# Altium PCB CONNECTORS1.PcbDoc
Units mil, origin at the board's own origin, x right, y up, seen from the top; angles counter-clockwise.
Board outline 1920.11 x 910.11 mil, 2 copper layers (Top Layer, Bottom Layer); 14 components, 6 nets, 47 pads, 1 vias.
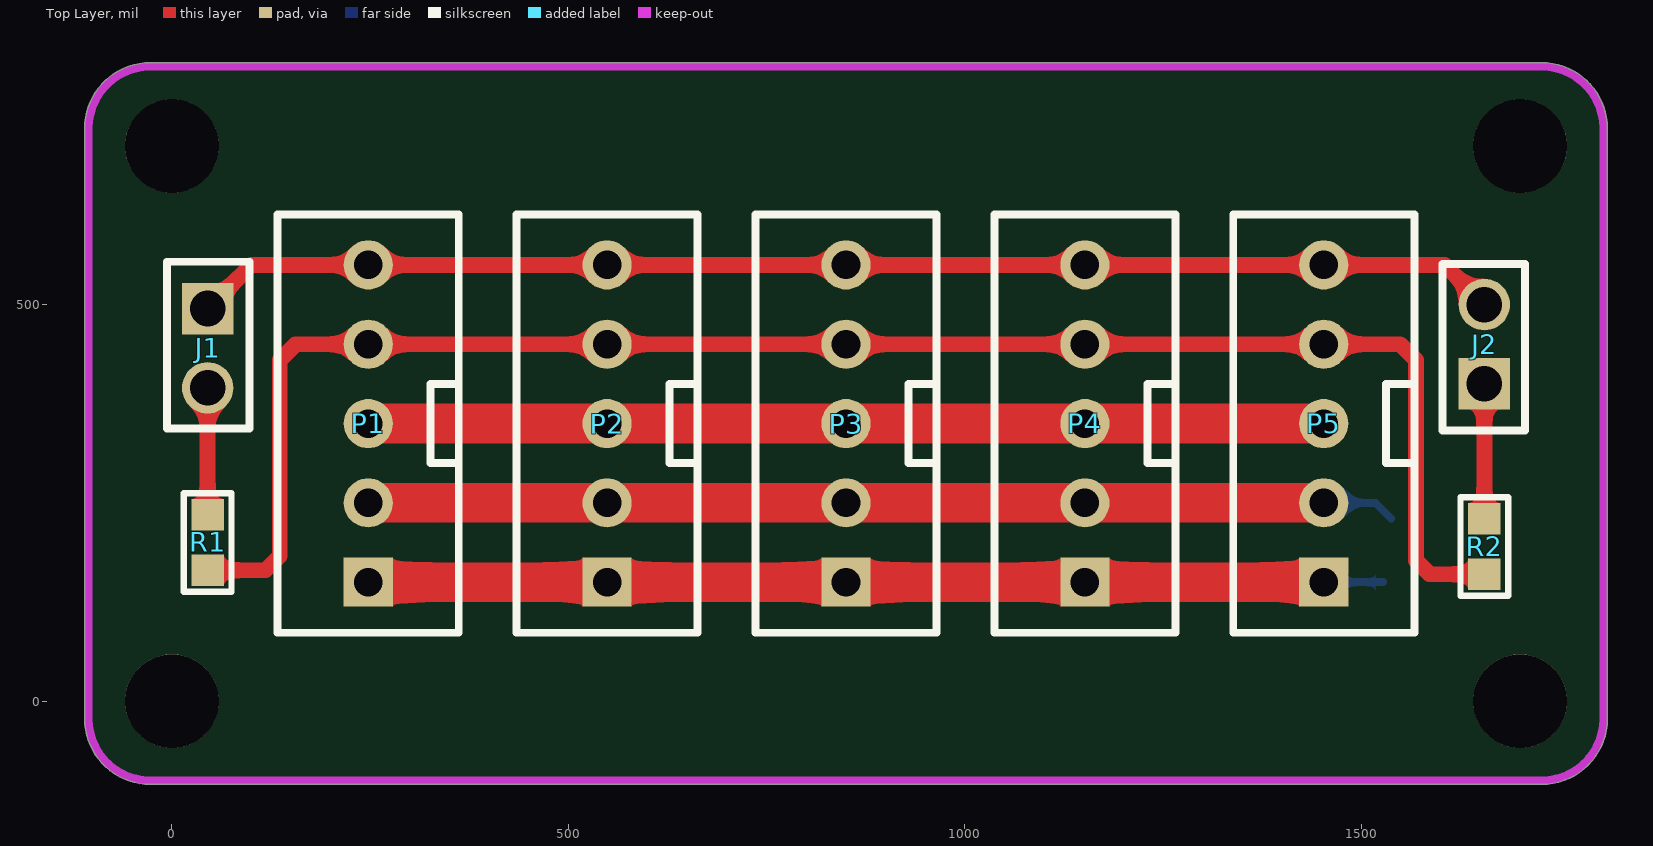
[diagram p0: Top Layer view]
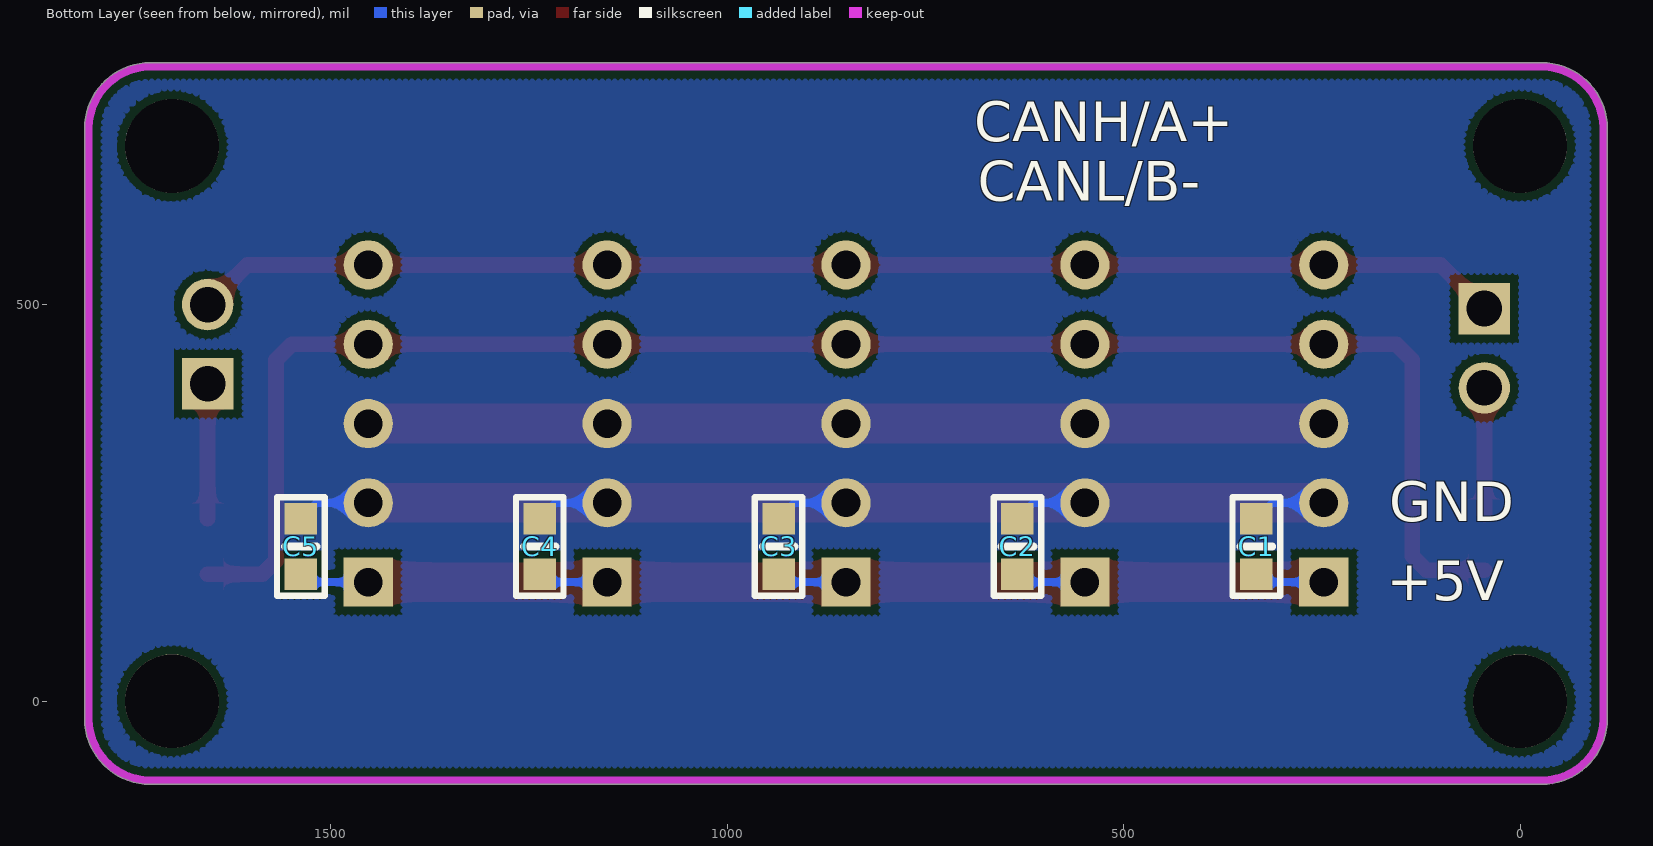
[diagram p1: Bottom Layer view, seen from below]
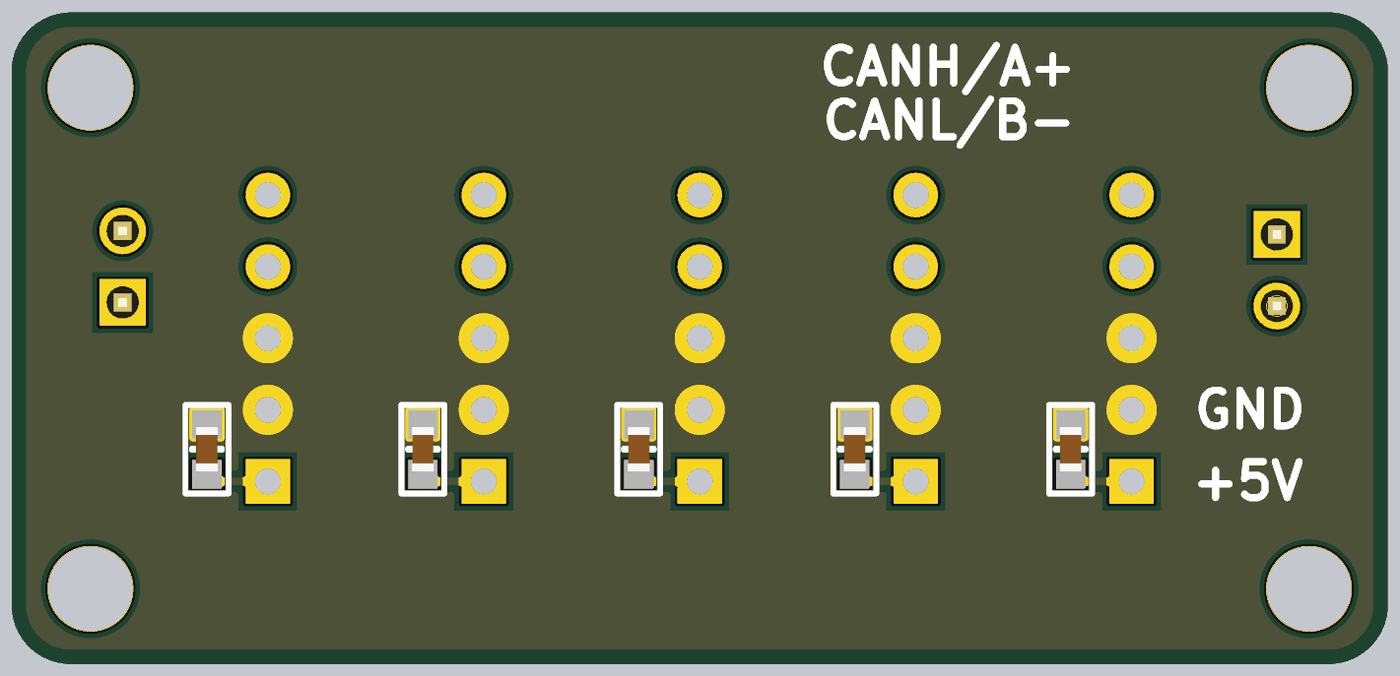
[diagram p2: 3D render of the assembled board from below, using the file's embedded part models]

## Layer stack, top to bottom
Top Solder: solder mask 0.4, Solder Resist, Dk 3.5
Top Layer: signal copper 1.4
Dielectric 1: dielectric 12.6, FR-4, Dk 4.8
Bottom Layer: signal copper 1.4
Bottom Solder: solder mask 0.4, Solder Resist, Dk 3.5

## Board outline
-110.06,-22.5 cw(c-105.04,-22.5) -109.88,-21.17 cw(c-105,-20) -110.01,-20 -110.01,721.86 cw(c-105.04,722.5) -110.06,722.5 cw(c-27.5,722.5) -27.5,805.06 cw(c-27.5,800.04) -26.87,805.01 1727.5,805.01 cw(c1727.5,722.46) 1810.06,722.46 cw(c1805.04,722.46) 1810.02,721.83 1810.02,-22.5 cw(c1805,-22.5) 1810.01,-22.53 ccw(c1727.46,-22.5) 1810.01,-22.5 1810.01,-22.53 cw(c1727.46,-22.5) 1727.46,-105.06 cw(c1727.46,-100.04) 1726.83,-105.01 -26.87,-105.01 cw(c-27.5,-100.04) -27.5,-105.06 cw(c-27.5,-22.5)

## Design rules (kind name [scope] priority, off if disabled: settings)
Clearance "Schematic Clearance Constraint" [InComponent('U6')] p1 off: gap=8
Clearance [All] p2: gap=10
ComponentClearance [All] p1: gap=0 collisioncheckmode=3 verticalgap=0 showdistances=FALSE
HoleSize [All] p1: absolutevalues=TRUE maxlimit=500 minlimit=1 maxpercent=80.000 minpercent=20.000
HoleToHoleClearance [All] p1: gap=0 allowstackedmicrovias=TRUE
MinimumSolderMaskSliver [All] p1: minsoldermaskwidth=0
PlaneConnect [All] p1: planeconnectstyle=Direct reliefexpansion=20 reliefentries=4 reliefconductorwidth=10 reliefairgap=10
PolygonConnect PolygonConnect_1 [IsVia vs InNet('GND')] p1 off: connectstyle=Direct reliefconductorwidth=10 reliefentries=4 polygonreliefangle="90 Angle" airgapwidth=10
PolygonConnect PolygonConnect_2 [All] p2: connectstyle=Direct reliefconductorwidth=10 reliefentries=4 polygonreliefangle="90 Angle" airgapwidth=10
RoutingVias [All] p1: holewidth=28 width=50 viastyle="Through Hole" minholewidth=28 minwidth=50 maxholewidth=28 maxwidth=50
SilkToSilkClearance [All] p1: silktosilkclearance=0
SilkToSolderMaskClearance [IsPad] p1: minsilkscreentomaskgap=0 clearancetoexposedcopper=TRUE
SolderMaskExpansion [All] p1: expansion=4
Width [All] p1: maxlimit=300 minlimit=8 preferedwidth=8
23 further rules are at their usual default settings.

## Components (designator, comment, footprint, x,y, rotation, side; value= is the part's Value field where it differs from the comment)
C1 "0.1uF/50V" 0603C 332.5,195 r270 bottom
C2 "0.1uF/50V" 0603C 633.75,195 r270 bottom
C3 "0.1uF/50V" 0603C 935,195 r270 bottom
C4 "0.1uF/50V" 0603C 1236.25,195 r270 bottom
C5 "0.1uF/50V" 0603C 1537.5,195 r270 bottom
J1 "Header 2" HDR1*2 45,445 r270 top
J2 "Header 2" HDR1*2 1655,450 r90 top
P1 "Header 5" XH2.54-5P 247.5,350 r90 top
P2 "Header 5" XH2.54-5P 548.75,350 r90 top
P3 "Header 5" XH2.54-5P 850,350 r90 top
P4 "Header 5" XH2.54-5P 1151.25,350 r90 top
P5 "Header 5" XH2.54-5P 1452.5,350 r90 top
R1 "120R" 0603R 50,200 r90 top
R2 "120R" 0603R 1660,195 r90 top

## Footprints (in the part's own frame and the unit in brackets; to place one, negate y for a bottom-side part, rotate by r counter-clockwise, add the part's x,y. Pads: shape width x height; smd on the part's side, far side on the other; paste and mask are expansions set on the pad)
0603C [mil]
  rect 40x41 smd: 1(-35,0) 2(35,0)
  silkscreen extent -62,-30 62,30, body extent -31,-16 31,16, height 24
0603R [mil]
  rect 40x41 smd: 1(35,5) 2(-35,5)
  silkscreen extent -62,-25 62,35, body extent -31,-11 31,21, height 18
HDR1*2 [mil]
  rect 65x65 hole 45: 1(-50,0)
  round 65 hole 45: 2(50,0)
  silkscreen extent -109,-51 101,53, body extent -104,-49 96,49, height 323
XH2.54-5P [mil] "Connector; Header; 5 Position"
  rect 62x62 hole 36: 1(-200,0)
  round 62 hole 36: 2(-100,0) 3(0,0) 4(100,0) 5(200,0)
  silkscreen extent -264,-114 264,114

## Part data
C1 C2 C3 C4 C5: library part CAP, "Capacitor"
J1 J2: "Header, 2-Pin"
P1 P2 P3 P4 P5: "Header, 5-Pin"
R1 R2: library part RES2A

## Free pads (board coordinates)
  round 118.11 hole 118.11: 0(0,0) 0(0,700) 0(1700,0) 0(1700,700)

## Via types
v1: diameter 50, hole 28, Top Layer to Bottom Layer, 1 vias

## Nets (pads, with @x,y where several pads share a name; then routed paths per layer and width w, separated by ;. In a path a pad name is that pad's centre, name@x,y a point inside that pad or via, vN(x,y) a via of type N, cw(c..) or ccw(c..) an arc to the next point about the centre after c; other vN are vias at no path point)
CANH/A+: P1.4 P2.4 P3.4 P4.4 P5.4 R1.2 R2.2 | length 2141.1
  Top Layer w20: R1.2 118,165 136,183 136,430 156,450 P1.4 P2.4 P3.4 P4.4 P5.4 1549,450 1569,430 1569,177 1586,160 R2.2
CANL/B-: J1.1 J2.2 P1.5 P2.5 P3.5 P4.5 P5.5 | length 1653.5
  Top Layer w20: J1.1 100,550 P1.5 P2.5 P3.5 P4.5 P5.5 1605,550 J2.2
GND: C1.1 C2.1 C3.1 C4.1 C5.1 P1.2 P1.3 P2.2 P2.3 P3.2 P3.3 P4.2 P4.3 P5.2 P5.3 | length 2876.4
  Top Layer w50: P1.2 P2.2 P3.2 P4.2 P5.2 ; P1.3 P2.3 P3.3 P4.3 P5.3
  Bottom Layer w10: P1.2 312.5,250 C1.1 ; P2.2 613.75,250 C2.1 ; P3.2 915,250 C3.1 ; P4.2 1216.25,250 C4.1 ; P5.2 1517.5,250 C5.1
NetJ1_2: J1.2 R1.1 | length 160
  Top Layer w20: R1.1 v1(45,395)
NetJ2_1: J2.1 R2.1 | length 170
  Top Layer w20: R2.1 J2.1
VCC_+5V: C1.2 C2.2 C3.2 C4.2 C5.2 P1.1 P2.1 P3.1 P4.1 P5.1 | length 1608.3
  Top Layer w50: P1.1 P2.1 P3.1 P4.1 P5.1
  Bottom Layer w10: P1.1 C1.2@322.5,150 ; P2.1 623.75,150 C2.2 ; P3.1 925,150 C3.2 ; P4.1 C4.2@1226.25,150 ; P5.1 C5.2@1527.5,150

## Polygon pours and split planes (outlines as drawn)
GND on Bottom Layer "Bottom Layer-No Net" (hatched 90Degree grid 8 track 8, remove dead copper, pour order 0): -102,802 -99,799 1800,799 1800,-98 1803,-101 1797,-95 -107,-95

## Keep-outs
Keep-Out Layer:
  lines w10: -105.04,-22.5 ccw(c-27.5,-22.5) -27.5,-100.04 ; -105.04,722.5 cw(c-27.5,722.5) -27.5,800.04 ; -105,-20 -105,722.5 ; -27.5,-100 1727.46,-100 ; -27.5,800 1727.5,800 cw(c1727.5,722.46) 1805.04,722.46 ; 1727.46,-100.04 ccw(c1727.46,-22.5) 1805,-22.5 1805,722.46

## Silkscreen, mask and mechanical layers (free items; w line width, h text height)
Bottom Overlay:
  text "CANH/A+" at 688,706 h50
  text "CANL/B-" at 684,631 h50
  text "GND" at 165,227 h50
  text "+5V" at 168,127 h50